# EAGLE board Simple-LM324-OP-AMP-based-USB-Li-ion-charger-alt (EAGLE 7.6.0)
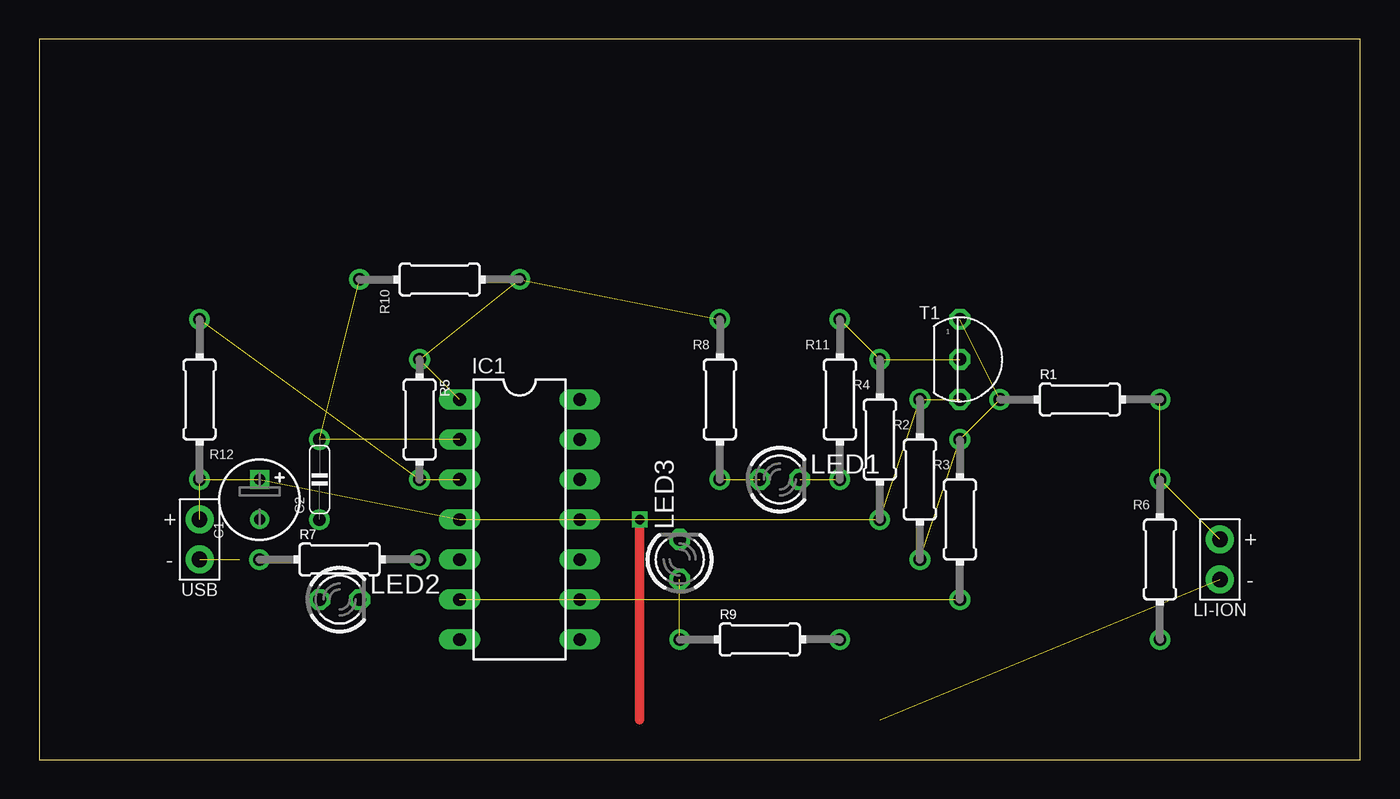
[diagram p0: board, top side]
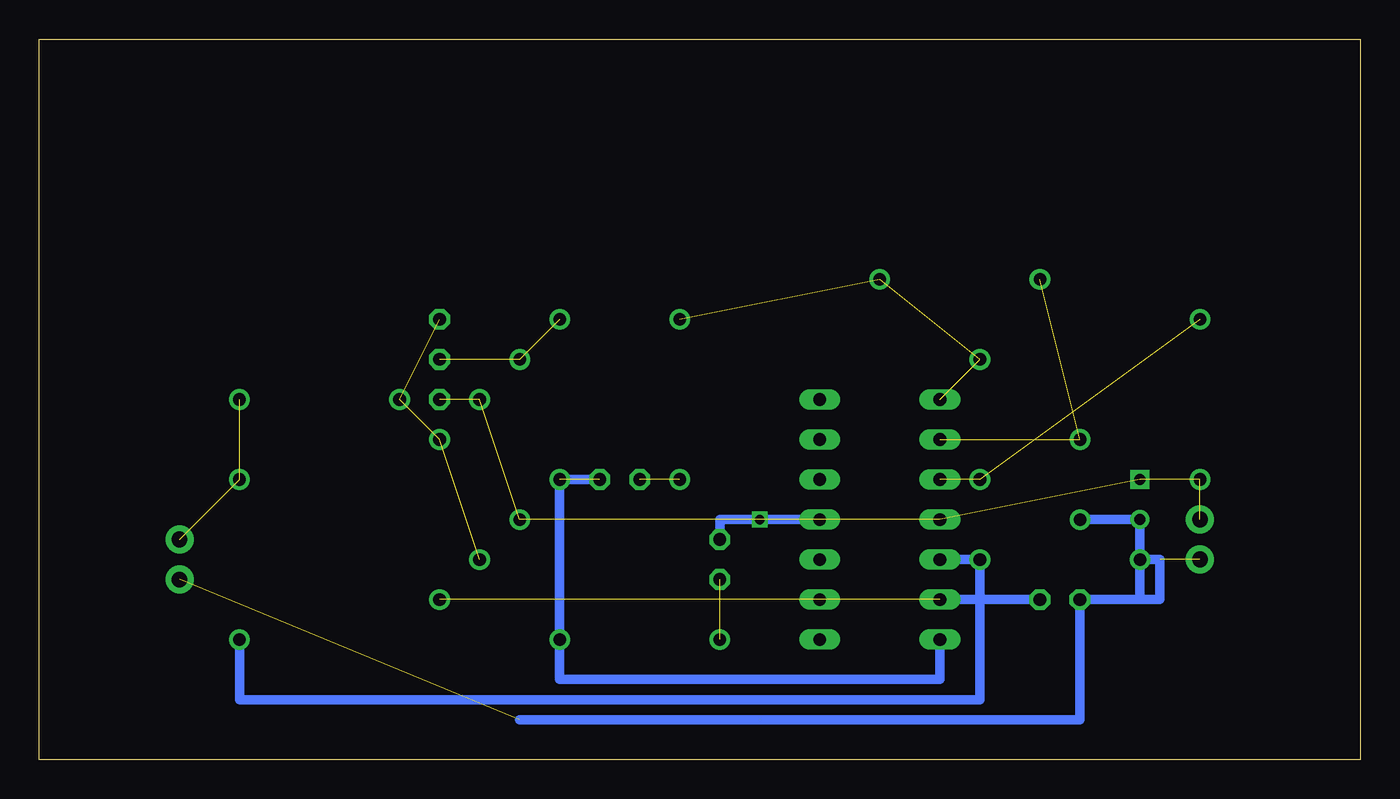
[diagram p1: board, bottom side, seen from below]

Size 83.82 x 45.72 mm. Coordinates in mm from the lower left corner, seen from the top.
Outline: 0,0 83.82,0 83.82,45.72 0,45.72 0,0
Copper layers (1*16): Top 0.035mm / dielectric 1.5mm / Bottom 0.035mm
Design rules "default": minimum track width 10mil, minimum drill 24mil, track to track 8mil, track to pad 8mil, pad to pad 8mil, via to via 8mil, smd to smd 8mil, copper to edge 40mil, drill to drill 8mil, minimum pad ring 10mil, minimum via ring 8mil, stop-mask expansion 4mil, vias tented up to drill 0mil, thermal gap 10mil

## Footprints (pad centres in the part's own frame; a part is rotated, then mirrored left to right if it is on the bottom)
E2,5-5 = drill 0.7 square: + 1.27,0 | drill 0.7: - -1.27,0
C050-020X044 = drill 0.8: 1 -2.54,0; 2 2.54,0
DIL14 = drill 0.8 long: 1 -3.81,7.62; 2 -3.81,5.08; 3 -3.81,2.54; 4 -3.81,0; 5 -3.81,-2.54; 6 -3.81,-5.08; 7 -3.81,-7.62; 8 3.81,-7.62; 9 3.81,-5.08; 10 3.81,-2.54; 11 3.81,0; 12 3.81,2.54; 13 3.81,5.08; 14 3.81,7.62
LED3MM = drill 0.813 octagon: A -1.27,0; K 1.27,0
SPAD+- = drill 1 pad 1.778: 1 0,-1.27; 2 0,1.27
0204/10 = drill 0.8: 1 -5.08,0; 2 5.08,0
0204/10-V = drill 0.8: 1 0,5.08; 2 0,-5.08
0204/7-V = drill 0.8: 1 0,3.81; 2 0,-3.81
TO92 = drill 0.8 octagon: 1 0,2.54; 2 0,0; 3 0,-2.54
SPAD-+ = drill 1 pad 1.778: 1 0,-1.27; 2 0,1.27

## Placement (x,y rotation side)
C1  100uF/16V  [E2,5-5]  13.97,16.51 90 top
C2  68nF  [C050-020X044]  17.78,17.78 90 top
IC1  LM324N  [DIL14]  30.48,15.24 0 top
LED1  Red  [LED3MM]  46.99,17.78 0 top
LED2  Green  [LED3MM]  19.05,10.16 0 top
LED3  Blue  [LED3MM]  40.64,12.7 90 top
LI-ION  SPAD+-+-  [SPAD+-]  74.93,12.7 0 top
R1  1  [0204/10]  66.04,22.86 0 top
R2  2.7k  [0204/10-V]  55.88,17.78 0 top
R3  2.2k  [0204/10-V]  58.42,15.24 0 top
R4  220  [0204/10-V]  53.34,20.32 0 top
R5  470  [0204/7-V]  24.13,21.59 180 top
R6  4.7k  [0204/10-V]  71.12,12.7 0 top
R7  3.6k  [0204/10]  19.05,12.7 0 top
R8  680  [0204/10-V]  43.18,22.86 0 top
R9  1k  [0204/10]  45.72,7.62 0 top
R10  680k  [0204/10-V]  25.4,30.48 90 top
R11  470  [0204/10-V]  50.8,22.86 0 top
R12  12k  [0204/10-V]  10.16,22.86 180 top
T1  BC327  [TO92]  58.42,25.4 0 top
USB  SPAD+--+  [SPAD-+]  10.16,13.97 0 top

## Library data of the parts
C1 C2 = c
IC1 = ic
LED1-LED3 = led
LI-ION USB = pad
R1-R12 = r
T1 = t

## Nets
GND: C1.- C2.1 IC1.11 LED2.A LED3.K LI-ION.1 R7.1 USB.1
N$1: IC1.3 R5.1 R12.2
N$2: IC1.1 R5.2 R8.1 R10.2
N$3: C2.2 IC1.2 R10.1
N$5: IC1.6 LED2.K R3.2
N$6: LED3.A R9.1
N$7: IC1.7 LED1.K R9.2 R11.2
N$8: LED1.A R8.2
N$9: R4.1 R11.1 T1.2
N$11: R1.1 R2.2 R3.1 T1.1
N$12: LI-ION.2 R1.2 R6.1
N$13: IC1.5 R6.2 R7.2
V+: C1.+ IC1.4 R2.1 R4.2 R12.1 T1.3 USB.2

## Tracks (layer width: path | path; a pad name or v marks a point on that pad's centre or on a via)
GND  (via drill 0.6)  (3 unrouted)
  Top 0.61: v38.1,15.24 38.1,2.54
  Bottom 0.61: C2.1 C1.- R7.1 | R7.1 13.97,10.16 LED2.A | R7.1 12.7,12.7 12.7,10.16 LED2.A | LED2.A 17.78,2.54 53.34,2.54 | IC1.11 v38.1,15.24 40.64,15.24 LED3.K
N$1  (2 unrouted)
N$2  (3 unrouted)
N$3  (2 unrouted)
N$5  (1 unrouted)
  Bottom 0.61: IC1.6 LED2.K
N$6  (1 unrouted)
N$7  (1 unrouted)
  Bottom 0.61: IC1.7 26.67,5.08 50.8,5.08 R9.2 | 50.8,8.89 R9.2 | LED1.K R11.2 R9.2
N$8  (1 unrouted)
N$9  (2 unrouted)
N$11  (3 unrouted)
N$12  (2 unrouted)
N$13
  Bottom 0.61: IC1.5 R7.2 24.13,3.81 71.12,3.81 R6.2
V+  (6 unrouted)